# Altium PCB Calimotion7_PCB.PcbDoc
Units mm, origin at the board's own origin, x right, y up, seen from the top; angles counter-clockwise.
Board outline 19 x 51.3 mm, 4 copper layers (Top Layer, GND, Power, Bottom Layer), stack 1.029 mm thick; 65 components, 49 nets, 304 pads, 146 vias.
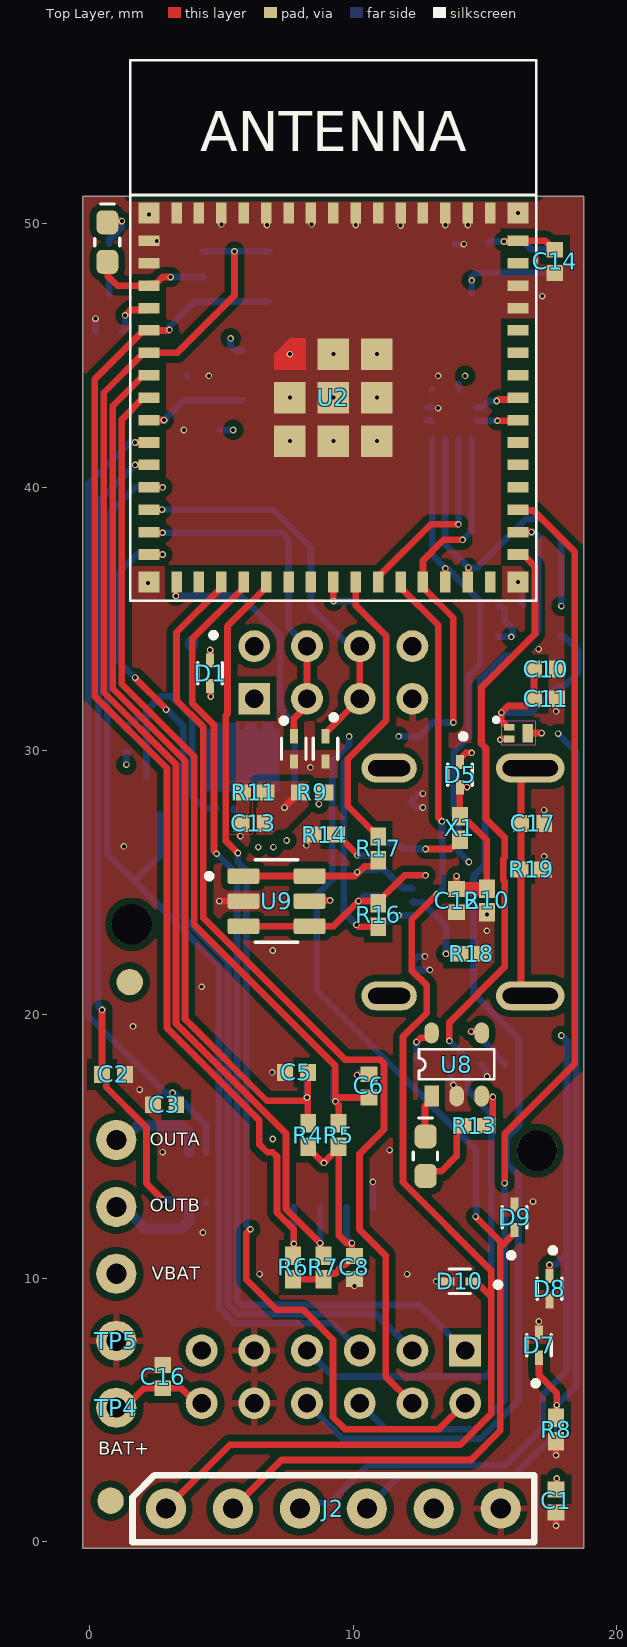
[diagram p0: Top Layer view]
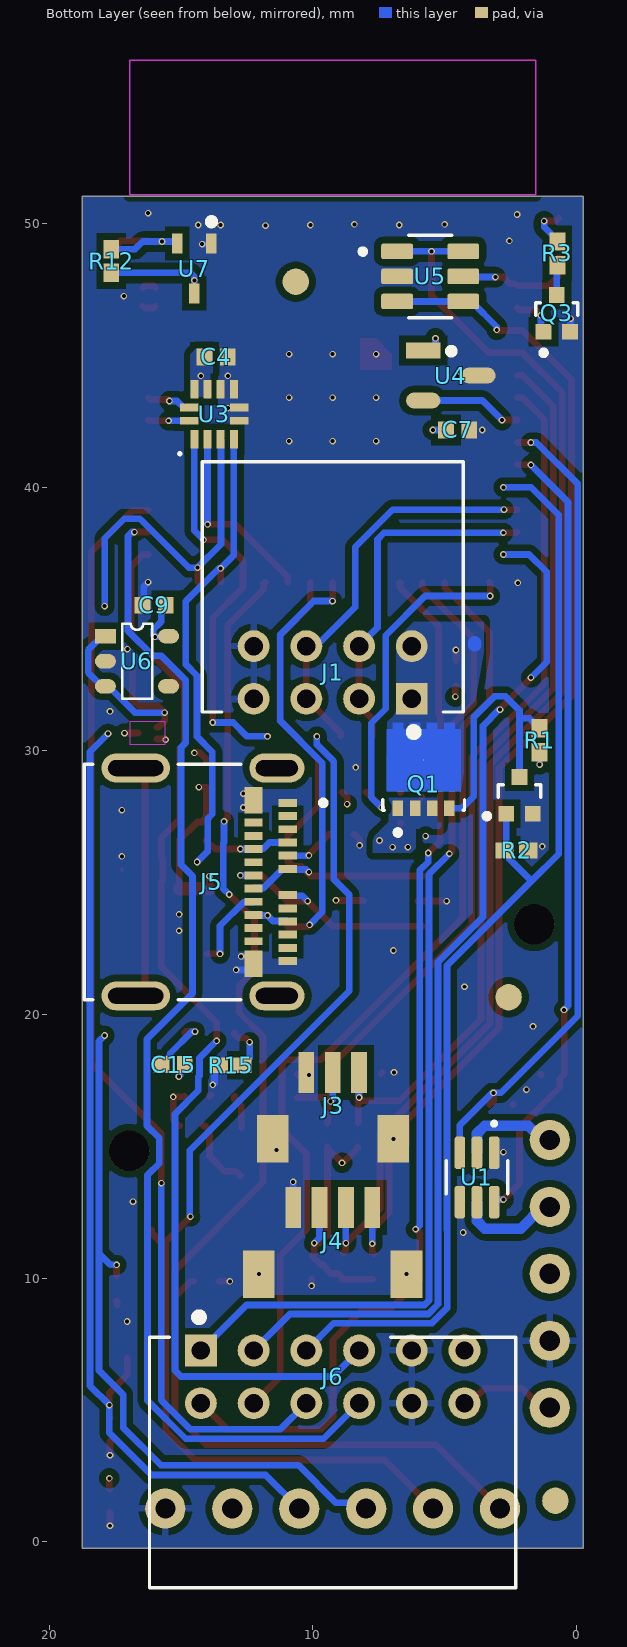
[diagram p1: Bottom Layer view, seen from below]
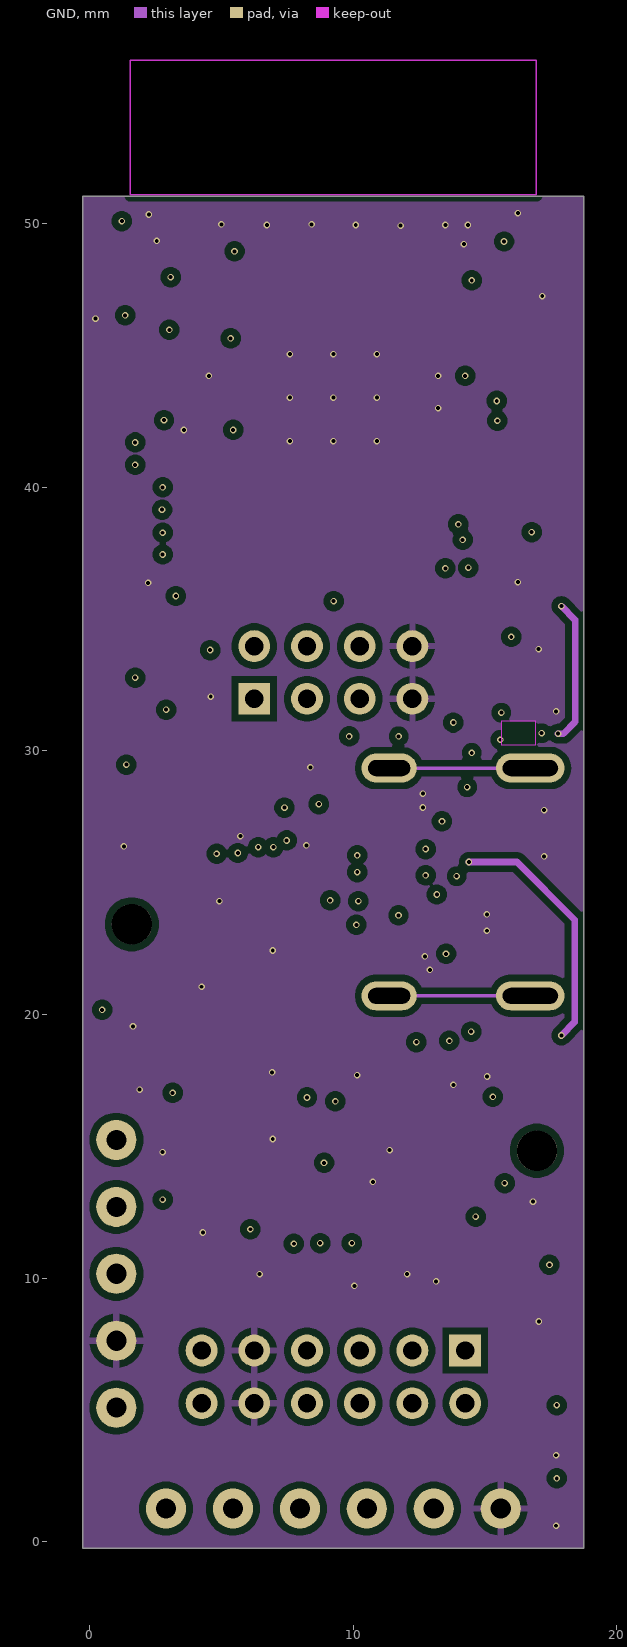
[diagram p2: GND]
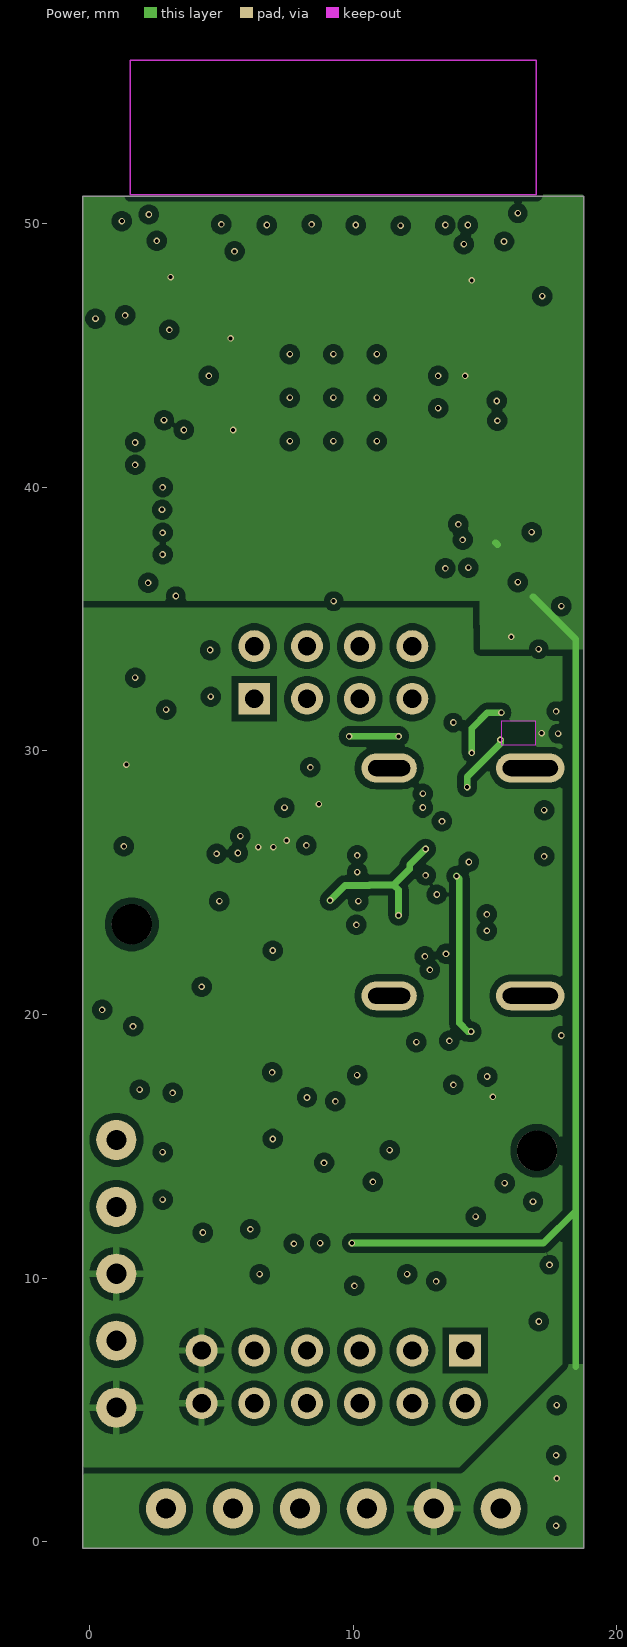
[diagram p3: Power]

## Layer stack, top to bottom
Top Solder: solder mask 0.0102, Solder Resist, Dk 3.5
Top Layer: signal copper 0.035
Dielectric 2: core 0.254, PP-006, Dk 4.2
GND: signal copper 0.035
Dielectric 1: prepreg 0.381, FR-4, Dk 4.2
Power: signal copper 0.035
Dielectric 3: core 0.254, PP-006, Dk 4.2
Bottom Layer: signal copper 0.035
Bottom Solder: solder mask 0.0102, Solder Resist, Dk 3.5

## Board outline
6.1,51.05 12.35,51.05 18.75,51.05 18.75,-0.25 -0.25,-0.25 -0.25,51.05
cut-out: 1.55,51.1 16.95,51.1 16.95,56.175 1.55,56.2

## Design rules (kind name [scope] priority, off if disabled: settings)
Clearance Clearance_1 [(ExistsOnLayer('GND') Or ExistsOnLayer('Power')) vs (ExistsOnLayer('GND') Or ExistsOnLayer('Power'))] p1: gap=0.254 ignorepadtopadclearanceinfootprint=FALSE except(0.09: Arc-Arc Arc-Track Arc-Text Track-Track Track-Text Text-Text; 0.127: Arc-SMDPad Track-SMDPad SMDPad-SMDPad SMDPad-THPad SMDPad-Text) sourcerule=43 cellrowname=All cellrowtype=0 cellcolname=All cellcoltype=0 innerlayers=TRUE
Clearance Clearance_2 [(ExistsOnLayer('Top Layer') Or ExistsOnLayer('Bottom Layer')) vs (ExistsOnLayer('Top Layer') Or ExistsOnLayer('Bottom Layer'))] p2: gap=0.254 ignorepadtopadclearanceinfootprint=FALSE except(0.09: Arc-Arc Arc-Track Arc-Text Track-Track Track-Text Text-Text; 0.127: Arc-SMDPad Track-SMDPad SMDPad-SMDPad SMDPad-THPad SMDPad-Text) sourcerule=43 cellrowname=All cellrowtype=0 cellcolname=All cellcoltype=0 outerlayers=TRUE
Clearance [All] p3: gap=0.254 ignorepadtopadclearanceinfootprint=FALSE ismatrix=TRUE
MinimumSolderMaskSliver [All] p1: minsoldermaskwidth=0.1
PolygonConnect [All] p1: connectstyle=Relief reliefconductorwidth=0.254 reliefentries=4 polygonreliefangle="90 Angle" airgapwidth=0.254
RoutingVias RoutingViaStyle_1 [All] p1: holewidth=0.15 width=0.3 viastyle="Through Hole" minholewidth=0.15 minwidth=0.25 maxholewidth=0.4 maxwidth=0.5
RoutingVias [All] p2: holewidth=0.711 width=1.27 viastyle="Through Hole" minholewidth=0.711 minwidth=1.27 maxholewidth=0.711 maxwidth=1.27
SilkToSolderMaskClearance [IsPad] p1: minsilkscreentomaskgap=0.15 clearancetoexposedcopper=TRUE
SolderMaskExpansion [All] p1: expansion=0.038 istentingtop=FALSE
SupplyNets "Schematic Supply Nets_5" [InNet('VUSB_FUSED')] p1: voltage=0.000
SupplyNets "Schematic Supply Nets_4" [InNet('VUSB')] p2: voltage=0.000
SupplyNets "Schematic Supply Nets_3" [InNet('VOUT')] p3: voltage=0.000
SupplyNets "Schematic Supply Nets_2" [InNet('GND')] p4: voltage=0.000
SupplyNets "Schematic Supply Nets_1" [InNet('VCPU')] p5: voltage=0.000
SupplyNets "Schematic Supply Nets" [InNet('VBAT')] p6: voltage=0.000
Width MaxMinWidth_1 [All] p1: maxlimit=1 minlimit=0.09 preferedwidth=0.254 minimp=50.000000 maximp=50.000000 favimp=50.000000
28 further rules are at their usual default settings.

## Classes and differential pairs
component class Power_Delivery: C9 C10 C11 C12 C13 C14 C15 C16 C17 C? D5 D? J5 J6 R9 R10 R11 R12 R13 R14 R15 R16 R17 R18 R19 R? TP4 TP5 U6 U7 U8 U9 VBAT X1 X?
component class "Calimotion 7": C1 C2 C3 C4 C5 C6 C7 C8 D1 D7 D8 D9 D10 J1 J2 J3 J4 OUTA OUTB Q3 R1 R3 R4 R5 R6 R7 R8 U1 U2 U3 U4 U5

## Components (designator, comment, footprint, x,y, rotation, side; value= is the part's Value field where it differs from the comment)
C1 "Capacitor" "CAP 0402_1005" 17.7,1.54 r90 top value=2.2u
C2 "Capacitor" "CAP 0402_1005" 0.91,17.725 r180 top value=100n
C3 "Capacitor" "CAP 0402_1005" 2.85,16.575 r180 top value=100n
C4 "Capacitor" "CAP 0402_1005" 13.675,44.95 r0 bottom value=2.2u
C5 "Capacitor" "CAP 0402_1005" 7.85,17.8 r180 top value=100n
C6 "Capacitor" "CAP 0402_1005" 10.6,17.29 r90 top value=100n
C7 "Capacitor" "CAP 0402_1005" 4.51,42.175 r0 bottom value=100n
C8 "Capacitor" "CAP 0402_1005" 10.05,10.4 r90 top value=2.2u
C9 "Capacitor" "CAP 0402_1005" 16.025,35.525 r180 bottom value=2.2u
C10 "Capacitor" "CAP 0402_1005" 17.3,33.1 r0 top value=2.2u
C11 "Capacitor" "CAP 0402_1005" 17.3,31.975 r0 top value=2.2u
C12 "Capacitor" "CAP 0402_1005" 13.925,24.315 r90 top value=100n
C13 "Capacitor" "CAP 0402_1005" 6.21,27.25 r180 top value=100n
C14 "Capacitor" "CAP 0402_1005" 17.65,48.575 r90 top value=100n
C15 "Capacitor" "CAP 0402_1005" 15.3,18.1 r180 bottom value=2.2u
C16 "Capacitor" "CAP 0402_1005" 2.775,6.26 r270 top value=2.2u
C17 "Capacitor" "CAP 0402_1005" 16.81,27.25 r0 top value=10n
D1 "TVS" SOD-923 4.575,32.945 r270 top
D5 "SHOTTKY" SOD-923 14.05,29.1 r270 top
D7 "TVS" SOD-923 17.05,7.45 r90 top
D8 "TVS" SOD-923 17.45,9.6 r270 top
D9 "TVS" SOD-923 16.125,12.305 r90 top
D10 "TVS" SOD-923 14.05,9.875 r180 top
J1 "S8B-PHDSS" JST_S8B-PHDSS 6.25,31.975 r0 bottom locked
J2 "1x06 Conn. 2.54mm" "1x06 Conn. 2.54mm" 9.25,1.25 r0 top locked
J3 "BM03B-SRSS-TB" BM03B-SRSS-TB 9.25,15.225 r180 bottom locked
J4 "BM04B-SRSS-TB" BM04B-SRSS-TB 9.225,10.825 r180 bottom locked
J5 "10152803-00011LF" AMPHENOL_10152803-00011LF 16.725,25.025 r270 bottom locked
J6 "S12B-PHDSS" JST_S12B-PHDSS 14.25,7.25 r180 bottom locked
OUTA "OUT B" THT-Test_Point 1.016,15.24 r0 top (schematic designator TP1)
OUTB "OUT A" THT-Test_Point 1.016,12.7 r90 top (schematic designator TP2)
Q1 "MOSFET-P" TRANS_8PDFN 5.8,29.3 r90 bottom
Q3 "MOSFET-N" TRANS_SOT-416 0.75,46.6 r90 bottom
R1 "Resistor" "RES 0402_1005 RF" 1.4,30.4 r270 bottom value=10K
R2 "Resistor" "RES 0402_1005 RF" 2.275,26.225 r180 bottom value=10K
R3 "Resistor" "RES 0402_1005 RF" 0.725,48.875 r90 bottom value=2K
R4 "Resistor" "RES 0402_1005 RF" 8.3,15.425 r90 top value=10K
R5 "Resistor" "RES 0402_1005 RF" 9.45,15.425 r90 top value=10K
R6 "Resistor" "RES 0402_1005 RF" 7.725,10.4 r270 top value=5.1k
R7 "Resistor" "RES 0402_1005 RF" 8.875,10.4 r270 top value=5.1k
R8 "Resistor" "RES 0402_1005 RF" 17.7,4.25 r90 top value=10K
R9 "Resistor" "RES 0402_1005 RF" 8.45,28.425 r180 top value=47K
R10 "Resistor" "RES 0402_1005 RF" 15.075,24.325 r270 top value=100k
R11 "Resistor" "RES 0402_1005 RF" 6.225,28.425 r180 top value=47K
R12 "Resistor" "RES 0402_1005 RF" 17.65,48.585 r270 bottom value=10K
R13 "Resistor" "RES 0402_1005 RF" 14.6,15.775 r180 top value=2.2k
R14 "Resistor" "RES 0402_1005 RF" 8.9,26.825 r180 top value=5.1k
R15 "Resistor" "RES 0402_1005 RF" 13.125,18.075 r0 bottom value=2.7k
R16 "Resistor" "RES 0402_1005 RF" 10.95,23.775 r270 top value=22
R17 "Resistor" "RES 0402_1005 RF" 10.95,26.3 r90 top value=22
R18 "Resistor" "RES 0402_1005 RF" 14.475,22.3 r180 top value=5.1k
R19 "Resistor" "RES 0402_1005 RF" 16.75,25.5 r0 top value=100k
TP4 "BAT+" THT-Test_Point 1.016,5.08 r90 top
TP5 "BAT-" THT-Test_Point 1.016,7.62 r90 top
U1 "DMG1024UV-7" 74LVC2G17GW,125 3.775,13.815 r270 bottom
U2 "ESP32-S3-MINI-1" ESP32-S3-MINI-1 9.25,43.4 r0 top locked
U3 "LIS2DE12TR" LIS2DE12TR_200X200X100-12N 13.75,42.775 r90 bottom
U4 "DRV5055" SOT23-3 4.775,44.225 r180 bottom
U5 "USBLC6-2SC6" SOT95P280X145-6N 5.55,48 r180 bottom
U6 "XC6210B332MR-G" SOT-25 16.675,33.4 r180 bottom
U7 "MIC803-29D3VC3" MIC803-29D3VC3 14.5,48.25 r0 bottom
U8 "XC6802A42XMR-G" SOT-25 13.925,18.1 r90 top
U9 "USBLC6-2SC6" SOT95P280X145-6N 7.095,24.3 r0 top
VBAT "VBAT" THT-Test_Point 1.016,10.16 r90 top (schematic designator TP3)
X1 "Fuse" "RES 0402_1005 RF" 14.05,27.075 r90 top

## Footprints (in the part's own frame and the unit in brackets; to place one, negate y for a bottom-side part, rotate by r counter-clockwise, add the part's x,y. Pads: shape width x height; smd on the part's side, far side on the other; paste and mask are expansions set on the pad)
"1x06 Conn. 2.54mm" [mil]
  round 60 hole 30: 1(-250,0) 2(-150,0) 3(-50,0) 4(50,0) 5(150,0) 6(250,0)
  silkscreen extent -300,-50 300,50
74LVC2G17GW,125 [mm] "SOP65 P210X110-6N"
  rrect50% 1.24x0.4 smd: 1(-0.935,0.65) 2(-0.935,0) 3(-0.935,-0.65) 4(0.935,-0.65) 5(0.935,0) 6(0.935,0.65)
  silkscreen extent -2.11,-1.16 0.63,1.16, body extent -1.05,-1 1.05,1, height 1.1
AMPHENOL_10152803-00011LF [mm]
  rect 0.3x0.7 smd: A1(-3,5.77) A2(-2.5,5.77) A3(-2,5.77) A4(-1.5,5.77) A5(-1,5.77) A6(-0.5,5.77) A7(0.5,5.77) A8(1,5.77) A9(1.5,5.77) A10(2,5.77) A11(2.5,5.77) A12(3,5.77) B2(2.25,4.47) B3(1.75,4.47) B4(1.25,4.47) B5(0.75,4.47) B6(0.25,4.47) B7(-0.25,4.47) B8(-0.75,4.47) B9(-1.25,4.47) B10(-1.75,4.47) B11(-2.25,4.47)
  rect 1x0.7 smd: B1(3.1,4.47) B12(-3.1,4.47)
  oval 1.1x2.6 hole 0.6 slot 2.1 at 90 deg: S1(-4.32,0) S2(4.32,0)
  oval 1.1x2.1 hole 0.6 slot 1.6 at 90 deg: S3(-4.32,5.36) S4(4.32,5.36)
  silkscreen extent -4.47,-1.95 4.47,7.22, body extent -4.5,-1.83 4.45,6.07, height 3.23
BM03B-SRSS-TB [mm] "Connector Header Surface Mount 3 position 0.039\" (1.00mm)"
  rect 0.6x1.55 smd: 1(1,2.575) 2(0,2.575) 3(-1,2.575)
  rect 1.2x1.8 smd: 4(-2.275,0.05) 5(2.3,0.05)
  body extent -2.5,-0.7 2.5,2.9, height 4.25
BM04B-SRSS-TB [mm] "Connector Header Surface Mount 4 position 0.039\" (1.00mm)"
  rect 0.6x1.55 smd: 1(1.475,1.85) 2(0.475,1.85) 3(-0.525,1.85) 4(-1.525,1.85)
  rect 1.2x1.8 smd: 4(-2.825,-0.675) 5(2.775,-0.675)
  body extent -3,-1.45 3,2.15, height 4.35
"CAP 0402_1005" [mm] "Chip Capacitor, 2-Leads, Body 1.02x0.51mm, IPC Medium Density"
  rect 0.6x0.64 smd: 1(-0.44,0) 2(0.44,0)
  body extent -0.5,-0.26 0.5,0.26, height 0.52
ESP32-S3-MINI-1 [mm]
  rect 0.8x0.4 smd: 1(-7,5.95) 2(-7,5.1) 3(-7,4.25) 4(-7,3.4) 5(-7,2.55) 6(-7,1.7) 7(-7,0.85) 8(-7,0) 9(-7,-0.85) 10(-7,-1.7) 11(-7,-2.55) 12(-7,-3.4) 13(-7,-4.25) 14(-7,-5.1) 15(-7,-5.95) 31(7,-5.95) 32(7,-5.1) 33(7,-4.25) 34(7,-3.4) 35(7,-2.55) 36(7,-1.7) 37(7,-0.85) 38(7,0) 39(7,0.85) 40(7,1.7) 41(7,2.55) 42(7,3.4) 43(7,4.25) 44(7,5.1) 45(7,5.95)
  rect 0.4x0.8 smd: 16(-5.95,-7) 17(-5.1,-7) 18(-4.25,-7) 19(-3.4,-7) 20(-2.55,-7) 21(-1.7,-7) 22(-0.85,-7) 23(0,-7) 24(0.85,-7) 25(1.7,-7) 26(2.55,-7) 27(3.4,-7) 28(4.25,-7) 29(5.1,-7) 30(5.95,-7) 46(5.95,7) 47(5.1,7) 48(4.25,7) 49(3.4,7) 50(2.55,7) 51(1.7,7) 52(0.85,7) 53(0,7) 54(-0.85,7) 55(-1.7,7) 56(-2.55,7) 57(-3.4,7) 58(-4.25,7) 59(-5.1,7) 60(-5.95,7)
  rect 1.2x1.2 smd: 61(-1.65,-1.65) 61(-1.65,0) 61(0,-1.65) 61(0,1.65) 61(0,0) 61(1.65,-1.65) 61(1.65,0) 61(1.65,1.65)
  round 0.025 smd: 61(-1.65,1.65)
  rect 0.8x0.8 smd: 62(-7,7) 63(-7,-7) 64(7,-7) 65(7,7)
  Top Layer region: -2.25,1.65 -2.25,1.05 -1.05,1.05 -1.05,2.25 -1.65,2.25
  Keep-Out Layer region: -7.7,7.7 7.7,7.7 7.7,12.8 -7.7,12.8
  Keep-Out Layer region: -7.7,12.8 7.7,12.8 7.7,7.7 -7.7,7.7
  silkscreen extent -7.7,-7.7 7.7,12.8, body extent -7.7,-7.73 7.7,12.78, height 2.55
JST_S8B-PHDSS [mm] "Connector Header Through Hole, Right Angle 8 position 0.079\" (2.00mm)"
  rect 1.208x1.208 hole 0.7: 1(0,0)
  round 1.208 hole 0.7: 2(0,-2) 3(2,0) 4(2,-2) 5(4,0) 6(4,-2) 7(6,0) 8(6,-2)
  silkscreen extent -1.95,-9 7.95,1.41, body extent -1.95,-9 7.95,0.5, height 5
JST_S12B-PHDSS [mm] "Connector Header Through Hole, Right Angle 12 position 0.079\" (2.00mm)"
  rect 1.208x1.208 hole 0.7: 1(0,0)
  round 1.208 hole 0.7: 2(0,-2) 3(2,0) 4(2,-2) 5(4,0) 6(4,-2) 7(6,0) 8(6,-2) 9(8,0) 10(8,-2) 11(10,0) 12(10,-2)
  silkscreen extent -1.95,-9 11.95,1.41, body extent -1.95,-9 11.95,0.5, height 5
LIS2DE12TR_200X200X100-12N [mm]
  rect 0.7x0.3 smd: 1(-0.95,0.75) 2(-0.95,0.25) 3(-0.95,-0.25) 4(-0.95,-0.75) 7(0.95,-0.75) 8(0.95,-0.25) 9(0.95,0.25) 10(0.95,0.75)
  rect 0.3x0.7 smd: 5(-0.25,-0.95) 6(0.25,-0.95) 11(0.25,0.95) 12(-0.25,0.95)
  silkscreen extent -1.55,1.25 -1.45,1.35, body extent -1,-1 1,1, height 1
MIC803-29D3VC3 [mm] "Supervisor Open Drain or Open Collector 1 Channel SC-70-3 Voltage - Threshold 2.93V"
  rect 0.4x0.75 smd: 1(-0.65,-1) 2(0.65,-1) 3(0,0.9)
  silkscreen extent -0.77,-1.95 -0.53,-1.7, body extent -1.13,-1.26 1.13,1.16, height 1.09
"RES 0402_1005 RF" [mm] "Chip Resistor, 2-Leads, Body 1.0x0.5mm, IPC High Density"
  rect 0.7x0.6 smd: 1(-0.45,0) 2(0.45,0)
  body extent -0.5,-0.25 0.5,0.25, height 0.35
SOD-923 [mm]
  rect 0.54x0.3 smd: A(0.48,0) C(-0.48,0)
  silkscreen extent -1.55,-0.47 0.4,0.47, body extent -0.5,-0.3 0.5,0.3, height 0.4
SOT23-3 [mm]
  rect 1.3x0.6 smd: 1(-1.041,0.965)
  oval 1.3x0.6 smd: 2(-1.041,-0.935) 3(1.059,0.015)
  silkscreen extent -0.09,0.83 0.14,1.05, body extent -1.18,-1.46 1.18,1.46, height 1.12
SOT95P280X145-6N [mm]
  rrect25% 1.21x0.59 smd: 1(-1.255,0.95) 2(-1.255,0) 3(-1.255,-0.95) 4(1.255,-0.95) 5(1.255,0) 6(1.255,0.95)
  silkscreen extent -2.66,-1.57 0.81,1.57, body extent -1.4,-1.46 1.4,1.46, height 1.44
SOT-25 [mm]
  rect 0.8x0.55 smd: 1(-1.2,0.95)
  oval 0.8x0.55 smd: 2(-1.2,0) 3(-1.2,-0.95) 4(1.2,-0.95) 5(1.2,0.95)
  silkscreen extent -0.57,-1.42 0.57,1.43, body extent -1.4,-1.45 1.4,1.45, height 1.3
THT-Test_Point [mil]
  round 60 hole 30: 1(0,0)
TRANS_8PDFN [mm]
  rect 0.6x0.4 smd: 1(-1.475,0.975) 2(-1.475,0.325) 3(-1.475,-0.325) 4(-1.475,-0.975)
  round 0.025 smd paste-1 mask+0: 5_8(0.35,0)
  Top Layer region: 1.525,1.175 1.775,1.175 1.775,0.775 1.525,0.775 1.525,0.525 1.775,0.525 1.775,0.125 1.525,0.125 1.525,-0.125 1.775,-0.125 1.775,-0.525 1.525,-0.525 1.525,-0.775 1.775,-0.775 1.775,-1.175 1.525,-1.175 1.525,-1.4 -0.825,-1.4 -0.825,1.4 1.525,1.4
  silkscreen extent -2.5,-1.55 -1.15,1.55, body extent -1.68,-1.65 1.68,1.65, height 0.8
TRANS_SOT-416 [mm]
  rect 0.6x0.6 smd paste-1: D(0.7,0) G(-0.7,0.5) S(-0.7,-0.5)
  silkscreen extent -1.6,-0.8 0.4,0.8, body extent -0.9,-0.8 0.9,0.8, height 0.8

## Part data
D1 D7 D8 D9 D10: library part DIO_1027, "TVS 5.8V 50W SOD523", Curr=50W, Manufacturer="On Semiconductor", Voltage=5.8V, Bin="2161 -- CT 198", FB_PCB_Number=DIO_1027, P_Id=27, Part_number=ESD5B5.0ST1G, Price=0.04790, Prod_Id=1045, Quantity=0
D5: "Generic Shottky", Package="SOD-923 ON Semiconductor", Availability=Unavailable, MF="ON Semiconductor", MP=ESD9X5.0ST5G, Price=None, SnapEDA_Link=https://www.snapeda.com/parts/ESD9X5.0ST5G/ON%20Semiconductor/view-part/237761/?ref=snap
J1: "Connector Header Through Hole, Right Angle 8 position 0.079 _2.00mm_", Package=None, Availability=Unavailable, MF="JST Sales", MP=S8B-PHDSS, Price=None, SnapEDA_Link=https://www.snapeda.com/parts/S8B-PHDSS/JST%20Sales%20America%20Inc./view-part/761599/?ref=snap
J3: "Connector Header Surface Mount 3 position 0.039\" (1.00mm)"
J4: "Connector Header Surface Mount 4 position 0.039\" (1.00mm)"
J5: "USB 3.2 Type C GEN 2 Receptacle SMT Dual Row 24in", Package=None, Availability="In Stock", Check_prices=https://www.snapeda.com/parts/10152803-00011LF/Amphenol/view-part/?ref=eda, MF="Amphenol FCI", MP=10152803-00011LF, Price=None, Purchase-URL=https://pricing.snapeda.com/search?q=10152803-00011LF&ref=eda, SnapEDA_Link=https://www.snapeda.com/parts/10152803-00011LF/Amphenol/view-part/?ref=snap
J6: "Connector Header Through Hole, Right Angle 12 position 0.079 _2.00mm_", Package=None, Availability=Unavailable, MF="JST Sales", MP=S8B-PHDSS, Price=None, SnapEDA_Link=https://www.snapeda.com/parts/S8B-PHDSS/JST%20Sales%20America%20Inc./view-part/761599/?ref=snap
OUTA OUTB TP4 TP5 VBAT: library part "Test Point"
Q1: "AON7423"
Q3: library part TRANS_1057, "MOSFET N-CH 20V 915MA SOT-416", Curr=915mA, Manufacturer="ON Semiconductor", Voltage=20V, FB_PCB_Number=TRANS_1057, Part_number=NTA4153NT1G, Price=NA, Pwr=300mW, Quantity=0
U1: "Mosfet Array 2 N-Channel _Dual_ 20V 1.38A 530mW Surface Mount SOT-563", Package="SOT-563 Diodes Inc.", Availability=Unavailable, MF="Diodes Inc.", MP=DMG1024UV-7, Price=None, SnapEDA_Link=https://www.snapeda.com/parts/DMG1024UV-7/Diodes%20Inc./view-part/391731/?ref=snap
U2: "Bluetooth, WiFi 802.11b/g/n, Bluetooth v5.0 Transceiver Module 2.4GHz PCB Trace Surface Mount"
U3: "Accelerometer X, Y, Z Axis Â±2g, 4g, 8g, 16g 0.5Hz ~ 2.69kHz 12-LGA _2x2_", Package="LGA-12 STMicroelectronics", Availability=Unavailable, MF=STMicroelectronics, MP=LIS2DE12TR, Price=None, SnapEDA_Link=https://www.snapeda.com/parts/LIS2DE12TR/STMicroelectronics/view-part/470072/?ref=snap
U4: "Hall Effect Sensor Single Axis SOT-23-3"
U5 U9: "17V Clamp 5A (8/20Âµs) Ipp Tvs Diode Surface Mount SOT-23-6", Package="SOT-23-6 STMicroelectronics", Availability="In Stock", Check_prices=https://www.snapeda.com/parts/USBLC6-2SC6/STMicroelectronics/view-part/?ref=eda, MF=STMicroelectronics, MP=USBLC6-2SC6, Price=None, Purchase-URL=https://pricing.snapeda.com/search/part/USBLC6-2SC6/?ref=eda, SnapEDA_Link=https://www.snapeda.com/parts/USBLC6-2SC6/STMicroelectronics/view-part/?ref=snap
U6: "Linear Voltage Regulator IC Positive Fixed 1 Output 700mA SOT-25"
U7: "Supervisor Open Drain or Open Collector 1 Channel SC-70-3 Voltage - Threshold 2.93V"
U8: "Charger IC Lithium Ion/Polymer SOT-25", Package="SOT-753 Torex", Availability=Unavailable, MF=Torex, MP=XC6802A42XMR-G, Price=None, SnapEDA_Link=https://www.snapeda.com/parts/XC6802A42XMR-G/Torex/view-part/378965/?ref=snap
X1: CURRENT=6V_500mA, RESISTANCE=1m, SimulationGenericComponent=True
C1 C2 C3 C4 C5 C6 C7 C8 C9 C10 C11 C12 C13 C14 C15 C16 C17: SimulationGenericComponent=True
R1 R2 R3 R4 R5 R6 R7 R8 R9 R10 R11 R12 R13 R14 R15 R16 R17 R18 R19: SimulationGenericComponent=True, TC1=0, TC2=0

## Free pads (board coordinates)
  rect 0.4x0.25 smd paste-2539.97 mask-2539.97: 1(15.925,30.45) 2(15.925,30.9)
  rect 0.4x0.7 smd paste-2539.97 mask-2539.97: 3(16.625,30.675)
  rrect53% 0.83x0.91 smd: A(0.675,48.55) A(12.75,13.875) C(0.675,50.05) C(12.75,15.375)
  rect 0.3x0.54 smd: A(7.75,29.595) A(8.95,29.595) C(7.75,30.555) C(8.95,30.555)
  rect 0.6x0.6 smd far side paste-1: D(2.163,29.013) G(2.662,27.613) S(1.663,27.613)
  round 1 smd mask-2539.97: FID(0.8,1.55) FID(1.525,21.225)
  round 1 smd far side mask+0.038: FID(0.8,1.55) FID(2.575,20.65) FID(10.65,47.8)
  round 1.524 hole 1.524: MNT(1.604,23.419) MNT(16.971,14.827)

## Via types
v1: diameter 0.25, hole 0.15, Top Layer to Bottom Layer, 145 vias
v2: diameter 0.25/0.25/0.25/0.25 (per signal layer), hole 0.15, Top Layer to Bottom Layer, 1 vias

## Nets (pads, with @x,y where several pads share a name; then routed paths per layer and width w, separated by ;. In a path a pad name is that pad's centre, name@x,y a point inside that pad or via, vN(x,y) a via of type N, cw(c..) or ccw(c..) an arc to the next point about the centre after c; other vN are vias at no path point)
ACCEL_INT1: U2.37 U3.12 | length 1.6
  Top Layer w0.254: v1(15.475,42.525) 16.225,42.525 U2.37
  Bottom Layer w0.254: U3.12 v1(15.475,42.525)
ACCEL_INT2: U2.38 U3.11 | length 1.7
  Top Layer w0.254: v1(15.45,43.275) 15.502,43.327 16.177,43.327 U2.38
  Bottom Layer w0.254: U3.11 14.9,43.025 15.15,43.275 v1(15.45,43.275)
BUTTON_A: C5.1 J3.1 R4.2 U2.7 | length 35.1
  Top Layer w0.254: U2.7 2.05,44.25 0.881,43.081 0.881,32.367 3.625,29.623 3.625,19.825 6.725,16.725 8.125,16.725 v1(8.25,16.85) ; C5.1@8.275,17.785 8.275,16.875 v1(8.25,16.85) ; R4.2 8.275,15.9 8.275,16.825 v1(8.25,16.85)
  Bottom Layer w0.254: v1(8.25,16.85) J3.1
BUTTON_B: C6.1 J3.2 R5.2 U2.8 | length 33.9
  Top Layer w0.254: U2.8 2.05,43.4 1.225,42.575 1.225,32.525 3.975,29.775 3.975,23.4 9.325,18.05 v1(9.325,16.7) ; R5.2 9.45,16.575 v1(9.325,16.7) ; C6.1 9.475,16.85 v1(9.325,16.7)
  Bottom Layer w0.254: J3.2 9.25,16.775 v1(9.325,16.7)
CPU_LED: Q3.G U2.4 | length 1.7
  Top Layer w0.254: v1(1.35,46.525) 1.552,46.727 2.177,46.727 U2.4
  Bottom Layer w0.254: Q3.G 1.35,46 v1(1.35,46.525)
CS0: U2.25 U3.2 | length 7.3
  Top Layer w0.254: U2.25 10.95,36.6 12.944,38.594 v1(13.994,38.594)
  Bottom Layer w0.254: v1(13.994,38.594) 14,38.6 U3.2
CS1: D10.C J2.1 U2.26 | length 49.5
  Top Layer w0.254: J2.1 5.325,3.675 14.068,3.675 15.235,4.842 15.235,9.29 ; U2.26 11.873,36.327 11.873,36.127 13.235,34.765 13.235,27.461 v1(13.371,27.325) ; v1(13.175,24.55) 12.219,23.594 12.219,21.668 12.796,21.091 12.796,20.062 11.894,19.16 11.894,13.631 15.235,10.29 15.235,9.29 ; D10.C 14.65,9.875 15.235,9.29
  Bottom Layer w0.254: v1(13.175,24.55) 13.406,24.781 13.406,26.485 13.371,26.52 v1(13.371,27.325)
D+: J5.A6 J5.B6 R17.1 U9.1 U9.6 | length 7.9
  Top Layer w0.254: U9.1 U9.6 10.075,25.25 10.225,25.4 10.452,25.627 10.777,25.627 10.95,25.8 R17.1 R17.1@10.913,25.887
  Bottom Layer w0.254: v1(10.156,25.4) 10.258,25.502 10.932,25.502 J5.A6 11.155,25.525 11.178,25.502 11.178,25.493 11.873,24.798 12.232,24.798 J5.B6
D-: J5.A7 J5.B7 R16.1 U9.3 U9.4 | length 9.1
  Top Layer w0.254: U9.3 U9.4 9.255,23.35 10.2,24.295 v1(10.2,24.3) 10.875,24.3 R16.1 10.95,24.275 11.95,25.275 v1(12.75,25.275)
  Bottom Layer w0.254: v1(10.2,24.3) 10.402,24.502 10.932,24.502 J5.A7 ; J5.B7 v1(12.75,25.275)
ESP_D+: R17.2 U2.24 | length 11.2
  Top Layer w0.254: U2.24 10.1,35.518 11.257,34.361 11.257,31.157 9.8,29.7 9.8,27.9 10.727,26.973 10.777,26.973 10.95,26.8 R17.2
ESP_D-: R16.2 U2.23 | length 15.9
  Top Layer w0.254: U2.23 9.25,35.691 v1(9.258,35.683) ; v1(10.125,23.4) 10.2,23.325 R16.2
  Bottom Layer w0.254: v1(9.258,35.683) 9.967,35.683 11.235,34.415 11.235,31.135 9.65,29.55 9.65,23.875 v1(10.125,23.4)
GND: C1.1 C2.1 C3.2 C4.1 C5.2 C6.2 C7.1 C8.1 C9.1 C10.2 C11.2 C12.1 C13.2 C14.1 C15.2 C16.1 C17.2 D1.A D7.A D8.A D9.A D10.A J1.7 J1.8 J2.6 J3.3 J3.4 J3.5 J4.4 J4.5 J5.A1 J5.A12 J5.B1 J5.B12 J6.9 J6.10 pad.A@7.75,29.595 pad.A@8.95,29.595 pad.S Q3.S R2.2 R8.1 R10.2 R11.2 R14.2 R15.2 R18.1 R19.2 TP5.1 U1.1 U1.4 U2.1 U2.2 U2.42 U2.43 U2.46 U2.47 U2.48 U2.49 U2.50 U2.51 U2.52 U2.53 U2.54 U2.55 U2.56 U2.57 U2.58 U2.59 U2.60 U2.61 U2.62 U2.63 U2.64 U2.65 U3.5 U3.6 U3.7 U3.8 U4.3 U5.2 U6.2 U7.1 U8.2 U9.2 | length 13.8
  Top Layer w0.09: R19.2@17.25,25.45 R19.2 R19.2@17.25,25.55
  Top Layer w0.254: TP5.1@1.016,7.112 1.15,6.978 TP5.1@1.15,7.074 ; C2.1@1.35,17.705 C2.1 ; v1@1.9,17.105 v1@1.9,17.155 ; v1(2.225,36.375) U2.63 ; v1(2.25,50.35) 2.225,50.375 U2.62 ; C3.2 C3.2@2.41,16.595 ; D1.A 4.598,32.442 v1(4.598,32.055) ; v1(4.925,24.3) U9.2@6.013,24.3 ; R11.2@5.87,28.245 R11.2@5.875,28.25 ; C5.2@7.37,17.8 C5.2@7.425,17.745 ; v1(8.227,26.414) 8.227,26.652 8.4,26.825 R14.2 ; v1(10.05,9.7) C8.1 ; v1(10.15,17.7) 10.57,17.7 C6.2 ; v1(13.15,9.875) D10.A ; U8.2@13.868,16.957 U8.2 ; U2.42@15.977,46.873 16.05,46.8 U2.42 16.377,46.8 U2.42@16.45,46.873 ; U2.43@15.977,47.577 16.05,47.65 U2.43 16.377,47.65 U2.43@16.45,47.577 ; v1(16.25,50.4) U2.65@16.275,50.375 ; D8.A@17.427,8.977 17.427,9.097 D8.A ; C14.1@17.63,48.135 C14.1 ; v1(17.7,0.6) C1.1 ; v1(17.7,3.275) R8.1
  Bottom Layer w0.254: v1(0.225,46.4) 0.225,45.925 Q3.S ; U4.3 U4.3@3.732,44.225 ; U1.4@4.404,12.859 U1.4 ; v1(10.15,17.7) J3.3 ; J4.4@10.75,12.675 v1(10.75,13.65) ; J5.B12@12.18,28.05 12.38,27.85 v1(12.644,27.85) ; J5.B1 12.255,21.848 12.478,21.625 12.478,21.689 v1(12.914,21.689) ; J5.B1@12.255,22.002 12.453,22.2 v1(12.725,22.2) ; J5.B12 12.255,28.151 12.478,28.374 v1(12.644,28.374) ; U3.5 U3.5@13,42.525 ; U3.6 12.954,43.025 U3.6@12.977,43.048 ; U3.7@12.977,43.702 U3.7 ; R15.2 13.731,17.919 13.731,17.394 v1(13.8,17.325) ; U7.1 13.875,49.225 v1(14.2,49.225) ; C15.2 14.86,18.08 15.033,17.907 15.033,17.697 v1(15.086,17.644) ; v1(16.25,36.4) 16.424,36.226 16.424,35.566 C9.1 ; U6.2@17.67,33.4 U6.2
  other v1: 17.05,8.35 6.45,10.15 12.05,10.15 4.3,11.725 16.825,12.9 2.775,14.775 11.388,14.85 6.95,15.275 1.9,17.15 6.925,17.8 1.65,19.55 4.25,21.05 6.95,22.425 15.075,23.175 15.075,23.8 17.25,26 1.3,26.375 5.722,26.765 17.25,27.75 8.375,29.375 17.7,31.5 17.041,33.859 7.6,41.75 9.25,41.75 10.9,41.75 3.575,42.175 13.225,43 7.6,43.4 9.25,43.4 10.9,43.4 4.525,44.225 13.225,44.225 7.6,45.05 9.25,45.05 10.9,45.05 17.175,47.25 2.55,49.35 11.8,49.925 6.725,49.95 10.1,49.95 13.5,49.95 14.35,49.95 5,49.975 8.425,49.975
HALL_EFFECT_IN: U2.9 U4.2 | length 3.9
  Top Layer w0.254: U2.9 v1(2.825,42.55)
  Bottom Layer w0.254: v1(2.825,42.55) 3.565,43.29 U4.2
LED_OUT_A: J1.3 J1.4 pad.C@7.75,30.555 U2.14 | length 13.4
  Top Layer w0.254: U2.14 2.275,38.275 v1(2.775,38.275) ; pad.C@7.75,30.555 7.744,30.561 7.744,31.211 8.25,31.717 J1.3 J1.4
  Bottom Layer w0.254: v1(2.775,38.275) 7.3,38.275 7.55,38.025 7.55,34.675 J1.4
LED_OUT_B: J1.5 J1.6 pad.C@8.95,30.555 U2.13 | length 15.4
  Top Layer w0.254: U2.13 v1(2.75,39.15) ; pad.C@8.95,30.555 8.95,30.675 J1.5 J1.6
  Bottom Layer w0.254: v1(2.75,39.15) 6.975,39.15 8.4,37.725 8.4,35.45 9.692,34.158 10.067,34.158 J1.6
MISO: D7.C J2.4 R8.2 U2.29 U3.3 | length 56.8
  Top Layer w0.254: J2.4 J2.4@10.739,1.469 ; U2.29 14.375,36.425 v1(14.375,36.95) ; D7.C 17.05,6.319 17.725,5.644 17.725,4.725 R8.2
  GND w0.254: v1(17.775,30.65) 17.975,30.65 18.425,31.1 18.425,34.966 v1(17.9,35.491)
  Bottom Layer w0.254: J2.4 11.795,2.525 16.125,2.525 17.725,4.125 v1(17.725,5.175) 18.458,5.908 18.458,29.967 v1(17.775,30.65) ; U3.3 13.488,41.813 13.488,37.837 v1(14.375,36.95) 14.709,36.95 16.565,38.806 17.16,38.806 17.9,38.066 v1(17.9,35.491)
MOSFET_OUT_A: OUTB.1 U1.5 | length 3.9
  Bottom Layer w0.4: OUTB.1@1.293,12.7 2.118,11.875 3.482,11.875 3.775,12.168 U1.5
  Bottom Layer w0.5: OUTB.1 OUTB.1@1.293,12.7
MOSFET_OUT_B: OUTA.1 U1.2 | length 3.8
  Bottom Layer w0.4: OUTA.1@1.293,15.24 1.828,15.775 3.482,15.775 3.775,15.482 U1.2
  Bottom Layer w0.5: OUTA.1 OUTA.1@1.293,15.24
MOSI: D8.C J2.3 U2.28 U3.4 | length 54.6
  Top Layer w0.254: U2.28 v1(13.5,36.925) ; D8.C v2(17.45,10.5)
  GND w0.254: v1(14.391,25.784) 16.216,25.784 18.406,23.594 18.406,19.706 v1(17.9,19.2)
  Bottom Layer w0.254: J2.3 8.199,1.469 9.123,1.469 10.554,2.9 15.775,2.9 17.2,4.325 17.2,5.575 18.114,6.489 18.114,10.939 ; U3.4 13,37.425 v1(13.5,36.925) 13.575,36.925 14.821,35.679 14.821,33.271 14.4,32.85 14.4,30.541 13.819,29.96 13.819,27.595 13.994,27.42 13.994,26.181 v1(14.391,25.784) ; v2(17.45,10.5) 17.675,10.5 18.114,10.939 ; v1(17.9,19.2) 18.114,18.986 18.114,10.939
NetC10_1: C10.1 C11.1 D5.C pad.2 U6.1 U6.3 | length 11.5
  Top Layer w0.254: D5.C 14.05,29.7 14.275,29.925 v1(14.5,29.925) ; pad.2 15.854,30.9 15.625,31.129 v1(15.625,31.45) 15.875,31.7 16.585,31.7 16.667,31.782 16.687,31.782 16.86,31.955 C11.1 C10.1
  Power w0.254: v1(14.5,29.925) 14.5,30.85 15.1,31.45 v1(15.625,31.45)
  Bottom Layer w0.254: v1(15.625,31.45) 16.75,31.45 17.75,32.45 U6.3 18,32.45 18.529,32.979 18.529,33.821 18,34.35 U6.1
NetC13_1: C13.1 R9.2 R11.1 U2.16 | length 12.9
  Top Layer w0.254: v1(3.275,35.875) 3.275,36.375 U2.16 ; C13.1 6.662,27.263 C13.1@6.675,27.275 ; R11.1@6.662,28.413 R11.1 ; v1(7.396,27.848) 7.396,27.871 7.95,28.425 R9.2
  Bottom Layer w0.254: v1(3.275,35.875) 5.743,35.875 7.235,34.383 7.235,31.597 7.785,31.047 7.785,28.237 v1(7.396,27.848)
NetC14_2: C14.2 R12.1 U2.45 U7.2 | length 4.7
  Top Layer w0.254: v1(15.725,49.325) 16.225,49.325 U2.45 17.295,49.35 17.63,49.015 C14.2
  Bottom Layer w0.254: U7.2 15.15,49.252 15.223,49.325 16.456,49.325 16.746,49.035 R12.1
NetC17_1: C17.1 J5.S1 J5.S2 J5.S3 J5.S4 R19.1 | length 19.7
  Top Layer w0.127: J5.S2@16.369,21.061 J5.S2 ; R19.1@16.369,25.431 R19.1 R19.1@16.37,25.57 ; J5.S1@16.37,28.99 J5.S1
  Top Layer w0.254: J5.S2@16.369,21.061 R19.1@16.369,25.431 ; R19.1@16.37,25.57 C17.1 J5.S1@16.37,28.99
  GND w0.127: J5.S4 J5.S2 ; J5.S3 J5.S1
NetD4_2: pad.C@0.675,50.05 R3.2 | length 1.6
  Top Layer w0.254: pad.C@0.675,50.2 0.775,50.1 v1(1.225,50.1)
  Bottom Layer w0.254: R3.2@0.75,49.25 0.75,49.4 1.225,49.875 v1(1.225,50.1)
NetD6_1: pad.A@12.75,13.875 R13.2 | length 2.8
  Top Layer w0.254: pad.A@12.75,13.875 12.923,14.048 13.348,14.048 13.927,14.627 13.927,15.602 14.1,15.775 R13.2
NetD6_2: pad.C@12.75,15.375 U8.1 | length 1.3
  Top Layer w0.254: pad.C@12.725,15.7 12.725,16.525 12.975,16.775 U8.1
NetJ5_A5: J5.A5 R14.1 | length 2
  Top Layer w0.254: R14.1 9.4,26.825 10.156,26.069 v1(10.156,26.037)
  Bottom Layer w0.254: v1(10.156,26.037) 10.168,26.025 J5.A5
NetJ5_B5: J5.B5 R18.2 | length 3.2
  Top Layer w0.254: v1(13.525,22.3) R18.2
  Bottom Layer w0.254: J5.B5 12.278,24.252 12.637,24.252 13.525,23.364 v1(13.525,22.3)
NetJ6_1: J6.1 U2.19 | length 38.2
  Top Layer w0.254: v1(4.825,26.096) 4.725,26.196 4.725,30.983 3.894,31.814 3.894,34.244 5.85,36.2 U2.19
  Bottom Layer w0.254: v1(4.825,26.096) 5.598,25.323 5.598,11.53 5.596,11.528 5.596,9.145 5.764,8.977 12.523,8.977 J6.1
NetJ6_2: J6.2 U2.20 | length 40.4
  Top Layer w0.254: v1(5.625,26.125) 5.171,26.579 5.171,31.345 5.231,31.405 5.231,34.731 6.7,36.2 U2.20 ; v1(6.104,11.85) 6.081,11.85 5.944,11.713 5.944,9.94 7.085,8.799 8.094,8.799 9.235,7.658 9.235,4.715 9.685,4.265 13.265,4.265 J6.2
  Bottom Layer w0.254: v1(5.625,26.125) 5.625,25.783 5.95,25.458 5.95,11.981 6.081,11.85 v1(6.104,11.85)
NetJ6_3: J6.3 U2.15 | length 39.7
  Top Layer w0.254: v1(1.731,32.775) 1.731,32.769 2.903,31.597 v1(2.903,31.563) ; U2.15 v1(2.775,37.45)
  Bottom Layer w0.254: v1(1.731,32.775) 1.125,33.381 1.125,36.775 1.8,37.45 v1(2.775,37.45) ; v1(2.903,31.563) 2.937,31.563 3.55,30.95 3.55,23.7 5.254,21.996 5.254,11.673 5.252,11.671 5.252,9.002 5.622,8.633 10.867,8.633 J6.3
NetJ6_4: J6.4 U2.18 | length 37.1
  Top Layer w0.254: U2.18 5,36.2 3.3,34.5 3.3,31.922 4.319,30.903 4.319,23.655 9.69,18.284 11.025,18.284 11.174,18.135 11.174,15.64 10.244,14.71 10.244,11.847 11.235,10.856 11.235,6.265 J6.4
NetJ6_5: J6.5 pad.G R2.1 U2.12 | length 43.9
  Top Layer w0.254: U2.12 v1(2.775,40)
  Bottom Layer w0.254: pad.G 2.662,26.613 2.662,26.013 1.707,25.057 ; v1(2.775,40) 1.725,40 0.675,38.95 0.675,33.031 0.669,33.025 0.669,26.095 1.707,25.057 ; J6.5 9.211,8.289 5.479,8.289 4.908,8.86 4.908,11.813 4.91,11.815 4.91,21.854 1.707,25.057
NetJ6_6: J6.6 U2.33 | length 42.5
  Top Layer w0.254: v1(15.75,13.6) 15.75,15.466 18.406,18.122 18.406,37.56 16.848,39.117 16.283,39.117 U2.33
  Bottom Layer w0.254: J6.6 11.235,4.265 14.658,4.265 15.75,5.357 v1(15.75,13.6)
NetJ6_7: J6.7 U2.31 | length 41.6
  Top Layer w0.254: v1(13.65,19) 13.65,19.697 15.75,21.797 15.75,25.041 15.696,25.095 15.696,25.905 15.75,25.959 15.75,26.716 15.044,27.422 15.044,30.097 14.869,30.272 14.869,32.403 16.904,34.438 16.904,36.996 16.45,37.45 U2.31
  Bottom Layer w0.254: J6.7 9.235,6.265 15.012,6.265 15.235,6.488 15.235,16.224 14.352,17.107 14.352,17.629 14.306,17.675 14.306,18.353 13.659,19 v1(13.65,19)
NetJ6_8: J6.8 U2.32 | length 45.3
  Top Layer w0.254: U2.32 v1(16.775,38.3)
  Bottom Layer w0.254: J6.8 9.6,3.9 14.825,3.9 16.275,5.35 16.275,13.907 15.828,14.354 15.828,15.3 16.294,15.766 16.294,19.069 14.569,20.794 14.569,25.246 15.006,25.683 15.006,30.135 14.821,30.32 14.821,32.669 15.763,33.611 16.077,33.611 17.019,34.553 17.019,38.151 16.87,38.3 v1(16.775,38.3)
NetQ1_G: pad.D Q1.4 R1.1 | length 9.9
  Bottom Layer w0.254: R1.1 1.4,30.9 1.573,31.073 1.623,31.073 1.786,31.237 2.163,31.237 ; pad.D 2.163,31.237 ; Q1.4 4.348,27.825 3.894,28.279 3.894,31.287 3.112,32.069 2.693,32.069 2.163,31.538 2.163,31.237
NetQ3_D: Q3.D R3.1 | length 1
  Bottom Layer w0.254: Q3.D R3.1@0.75,48.3
NetR15_1: R15.1 U8.5 | length 1.8
  Top Layer w0.254: v1(12.4,18.95) 12.568,19.118 12.838,19.118 12.975,19.255 U8.5
  Bottom Layer w0.254: v1(12.4,18.95) 12.4,18.35 12.452,18.298 12.452,18.248 12.625,18.075 R15.1
OUT_A: C3.1 U1.3 U2.10 | length 30.9
  Top Layer w0.254: v1(1.731,41.7) U2.10 ; v1(3.15,17.025) 3.15,16.721 C3.1@3.29,16.581
  Bottom Layer w0.254: v1(1.731,41.7) 1.525,41.7 -0.05,40.125 -0.05,19.95 2.875,17.025 3.2,17.025 4.425,15.8 U1.3
OUT_B: C2.2 U1.6 U2.11 | length 30.4
  Top Layer w0.254: v1(0.475,20.175) 0.47,20.17 C2.2 0.634,17.561 0.634,17.238 2.159,15.713 2.159,13.591 v1(2.775,12.975) ; v1(1.731,40.85) U2.11
  Bottom Layer w0.254: v1(0.475,20.175) 0.325,20.325 0.325,39.444 v1(1.731,40.85) ; v1(2.775,12.975) 3.052,12.975 3.125,12.902 U1.6
SCK: D9.C J2.2 U2.27 U3.1 | length 58.6
  Top Layer w0.254: J2.2 7.286,3.096 14.471,3.096 15.579,4.204 15.579,11.159 ; v1@13.8,31.098 13.8,35.05 12.65,36.2 U2.27 12.65,37.225 13.433,38.008 v1(14.158,38.008) ; v1(14.65,12.325) 15.579,11.396 15.579,11.159 ; D9.C 16.125,11.705 15.579,11.159
  Power w0.254: v1(9.85,30.55) v1(11.725,30.55)
  Bottom Layer w0.254: v1(9.85,30.55) 9.85,30.236 9.206,29.592 9.206,25.122 8.619,24.535 8.619,20.899 14.675,14.843 14.675,12.35 v1(14.65,12.325) ; v1(11.725,30.55) 12.5,30.55 13.025,31.075 v1(13.8,31.075) ; v1(14.158,38.008) 14.5,38.35 U3.1
SCL: J4.1 R6.1 U2.5 U5.3 U5.4 | length 45.7
  Top Layer w0.254: v1(3.025,45.975) 3,45.95 U2.5 2.05,45.95 0.193,44.093 0.193,32.082 2.937,29.338 2.937,19.488 6.444,15.981 6.444,15.065 6.74,14.769 6.951,14.769 7.112,14.608 7.112,12.477 7.75,11.839 7.75,10.975 R6.1@7.7,10.925
  Bottom Layer w0.254: v1(3.025,45.975) 3.025,46.09 3.985,47.05 U5.4 U5.3 ; v1(7.75,11.3) J4.1
SDA: J4.2 R7.1 U2.6 U5.1 U5.6 | length 48.1
  Top Layer w0.254: v1(5.5,48.95) 5.5,47.275 3.325,45.1 U2.6 2.05,45.1 0.537,43.587 0.537,32.224 3.281,29.481 3.281,19.66 7.456,15.485 7.456,12.619 v1(8.75,11.325) 8.75,11.05 R7.1@8.85,10.95
  Bottom Layer w0.254: U5.6 v1(5.5,48.95) U5.1 ; v1(8.75,11.325) J4.2
VBAT: C16.2 J6.11 J6.12 pad.3 Q1.1 Q1.2 Q1.3 R1.2 R9.1 R13.1 TP4.1 U8.3 VBAT.1 | length 7.7
  Top Layer w0.254: TP4.1@1.15,5.175 1.429,5.175 2.074,5.82 C16.2 3.476,5.82 4.046,5.25 J6.12 ; v1(8.7,27.98) 8.7,28.252 8.873,28.425 R9.1 ; U8.3 14.9,16.875 v1(15.3,16.875) 15.3,16.025 15.273,15.998 15.273,15.948 15.1,15.775 R13.1 ; pad.3 v1(17.15,30.675)
  Power w0.254: TP4.1@0.374,4.985 0.921,4.985 TP4.1 TP4.1@1.054,5.118 ; J6.12@4.213,5.213 J6.12
  Bottom Layer w0.254: v1(1.4,29.475) R1.2 ; Q1.3@5.475,27.725 Q1.3
  other v1: 6.4,26.35 6.975,26.35 7.475,26.6
VCPU: C1.2 C4.2 C7.2 C8.2 C9.2 J2.5 J4.3 pad.A@0.675,48.55 R4.1 R5.1 R6.2 R7.2 R12.2 U2.3 U3.9 U3.10 U4.1 U5.5 U6.5 U7.3 | length 61.8
  Top Layer w0.254: pad.A@0.675,48.7 0.687,48.688 0.687,48.013 1.05,47.65 U2.3 2.323,47.723 2.523,47.723 2.775,47.975 v1(3.075,47.975) ; R6.2 R7.2 8.875,10 9.048,10.173 9.327,10.173 9.476,10.322 9.476,10.365 9.625,10.514 9.704,10.514 C8.2@10.03,10.84 ; R4.1 8.3,14.925 8.854,14.371 v1(8.896,14.371) ; v1@8.896,14.379 9.125,14.608 9.133,14.608 9.45,14.925 R5.1 9.45,11.625 9.75,11.325 v1(9.95,11.325) 9.95,10.92 C8.2@10.03,10.84 ; C8.2 C8.2@10.03,10.84 ; C1.2 17.725,2.005 v1(17.725,2.4)
  Power w0.254: v1(9.95,11.325) 17.225,11.325 18.45,12.55 ; 15.4,37.9 15.475,37.825 ; 16.825,35.85 18.45,34.225 18.45,12.55 ; 18.45,6.64 18.45,12.55
  Bottom Layer w0.254: v1(3.075,47.975) 4.27,47.975 U5.5 ; C7.2 v1(5.45,42.175) ; v1(5.35,45.65) 5.35,45.363 5.523,45.19 U4.1 ; J4.3 9.75,11.525 v1(9.95,11.325) ; U3.9 U3.9@14,43.925 ; U7.3 14.5,47.986 14.649,48.135 R12.2 ; U6.5 15.5,34.325 v1(16,34.325) 16.059,34.384 16.059,34.594 15.758,34.895 15.758,35.352 C9.2 C9.2@15.53,35.47
  other v1: 14.25,44.225 14.5,47.85
VOUT: D1.C J1.1 J1.2 Q1.5_8 | length 0.6
  Top Layer w0.254: D1.C v1(4.575,33.825)
  Bottom Layer w0.254: 3.825,34.05 3.863,34.012 ; J1.2@6.212,34.012 J1.2
  Bottom Layer w0.5: 3.863,34.012 3.863,34.088 3.875,34.1 ; J1.2@6.179,33.979 J1.2@6.212,34.012
VUSB: J5.A4 J5.A9 J5.B4 J5.B9 U9.5 X1.1 | length 11.6
  Top Layer w0.254: U9.5@8.079,24.3 8.104,24.325 v1(9.125,24.325) ; v1(12.75,26.275) 13.7,26.275 13.827,26.402 13.877,26.402 14.05,26.575 X1.1
  Power w0.254: v1(9.125,24.325) 9.694,24.894 10.606,24.894 10.625,24.913 11.538,24.913 ; v1(11.721,23.757) 11.721,24.729 11.538,24.913 ; v1(12.75,26.275) 12.144,25.669 12.144,25.519 11.538,24.913
  Bottom Layer w0.254: J5.A9 10.978,23.548 11.513,23.548 v1(11.721,23.757) ; J5.A4 11.646,26.525 11.873,26.298 12.232,26.298 J5.B9 v1(12.75,26.275) ; v1@11.727,23.752 12.232,23.752 J5.B4
VUSB_FUSED: C12.2 C15.1 D5.A pad.1 R10.1 U8.4 X1.2 | length 17.4
  Top Layer w0.254: v1(13.925,25.25) C12.2 C12.2@13.935,24.765 ; v1(14.325,28.625) 14.055,28.625 D5.A X1.2 14.05,27.475 14.223,27.302 14.382,27.302 15.075,26.609 R10.1 R10.1@15.065,24.765 ; v1(14.475,19.35) 14.825,19.35 U8.4 ; v1(15.589,30.421) 15.616,30.448 15.923,30.448 pad.1
  Top Layer w0.5: C12.2@13.935,24.765 R10.1@15.065,24.765
  Power w0.254: v1(13.925,25.25) 14.031,25.144 14.031,19.669 14.35,19.35 v1(14.475,19.35) ; v1(14.325,28.625) 14.325,29.012 15.589,30.276 v1(15.589,30.421)
  Bottom Layer w0.254: v1(14.475,19.35) 14.589,19.35 15.414,18.525 15.414,18.446 15.74,18.12 C15.1
pads on no net: J5.A2 J5.A3 J5.A8 J5.A10 J5.A11 J5.B2 J5.B3 J5.B8 J5.B10 J5.B11 U2.17 U2.21 U2.22 U2.30 U2.34 U2.35 U2.36 U2.39 U2.40 U2.41 U2.44 U6.4

## Polygon pours and split planes (outlines as drawn)
GND on GND "GND_L02_P001" (solid, pour order 1): -0.25,51 18.75,51 18.75,-0.25 -0.25,-0.25
GND on Top Layer "GND_L01_P028" (solid, pour order 28): -0.25,51.05 18.75,51.05 18.75,-0.25 -0.25,-0.25
GND on Top Layer "GND_L01_P022" (solid, pour order 22): 9.379,29.15 9.379,30.1 7.529,30.1 7.529,29.15
NetC13_1 on Top Layer "NETC13_1_L01_P021" (solid, pour order 21): 8.4,28.85 8.4,28 7.225,26.825 6.275,26.825 6.275,28.85
GND on Top Layer "GND_L01_P020" (solid, pour order 20): 5.275,28.85 6.175,28.85 6.175,26.825 5.275,26.825
VCPU on Power "VCPU_L03_P014" (solid, pour order 14): 14.825,33.85 14.8,35.7 -0.25,35.7 -0.25,51.05 18.75,51.1 18.75,33.85
VCPU on Power "VCPU_L03_P023" (solid, pour order 23): 18.75,6.725 18.75,-0.25 12,-0.25 -0.25,-0.25 -0.25,2.825 14.025,2.825 17.925,6.725
VBAT on Power "VBAT_L03_P015" (solid, pour order 15): -0.25,35.425 14.6,35.425 14.6,33.675 17.925,33.675 17.925,6.725 14.025,2.825 -0.25,2.825 -0.275,2.85
GND on Bottom Layer "GND_L04_P033" (solid, pour order 33): -0.25,51.05 18.75,51.05 18.75,-0.25 -0.25,-0.25
VBAT on Bottom Layer "VBAT_L04_P032" (solid, pour order 32): 5.175,28.325 5.18,28.33 7.121,28.33 7.121,27.312 7.725,26.708 7.725,26.125 6.275,26.125 6.1,26.3 6.1,27.05 5.125,27.05
GND on Bottom Layer "GND_L04_P026" (solid, pour order 26): 2.063,27.913 0.988,27.913 0.988,26.313 2.063,26.313
GND on Bottom Layer "GND_L04_P025" (solid, pour order 25): 13.65,44.075 13.55,45.275 12.85,45.275 12.85,43.575 12.45,43.175 12.45,42.375 13.15,42.375 13.65,43.025
VCPU on Bottom Layer "VCPU_L04_P024" (solid, pour order 24): 13.8,45.275 13.8,43.375 14.65,43.375 14.65,45.05 14.425,45.275
VOUT on Bottom Layer "VOUT_L04_P019" (solid, pour order 19): 3.525,34.9 7.15,34.9 7.2,28.475 4.4,28.475 3.525,33.75

## Keep-outs
Keep-Out Layer:
  pour cut-out: 15.625,30.225 16.925,30.225 16.925,31.125 15.625,31.125

## Silkscreen, mask and mechanical layers (free items; w line width, h text height)
Top Overlay:
  circle w0.2: c9.265,31.268 r0.1
  circle w0.2: c7.375,31.15 r0.1
  circle w0.254: c15.425,31.175 r0.035
  lines w0.127: 0.2,49.16 0.2,49.23 0.2,49.37 0.2,49.44 ; 0.425,50.75 0.933,50.75 ; 1.15,49.17 1.15,49.45 ; 7.285,29.675 7.285,30.475 ; 8.215,29.675 8.215,30.475 ; 8.485,29.675 8.485,30.475 ; 9.415,29.675 9.415,30.475 ; 12.275,14.485 12.275,14.765 ; 12.496,16.072 13.004,16.072 ; 13.2,14.485 13.2,14.765
  text "BAT+" at 0.327,3.302 h0.5
Bottom Overlay:
  circle w0.2: c3.4,27.525 r0.1
  lines w0.127: 1.362,28.24 1.362,28.713 1.543,28.713 ; 2.782,28.713 2.963,28.713 2.963,28.24
Top Paste:
  region: 15.775,30.325 15.775,30.575 16.075,30.575 16.075,30.325
  region: 15.775,30.775 15.775,31.025 16.075,31.025 16.075,30.775
  region: 16.475,30.375 16.475,30.975 16.775,30.975 16.775,30.375
Top Solder:
  circle w1: c0.8,1.55 r0.5
  circle w0.5: c0.8,1.55 r0.25
  circle w1: c1.525,21.225 r0.5
  circle w0.5: c1.525,21.225 r0.25
  region: 15.675,30.275 15.675,30.625 16.175,30.625 16.175,30.275
  region: 15.675,30.725 15.675,31.075 16.175,31.075 16.175,30.725
  region: 16.375,30.275 16.375,31.075 16.875,31.075 16.875,30.275
  lines w1: 0.3,1.55 1.3,1.55 ; 1.025,21.225 2.025,21.225
Bottom Solder:
  circle w0.5: c0.8,1.55 r0.25
  circle w1: c0.8,1.55 r0.5
  circle w1: c2.575,20.65 r0.5
  circle w0.5: c2.575,20.65 r0.25
  circle w1: c10.65,47.8 r0.5
  circle w0.5: c10.65,47.8 r0.25
  lines w1: 0.3,1.55 1.3,1.55 ; 2.075,20.65 3.075,20.65 ; 10.15,47.8 11.15,47.8
Mechanical 1:
  lines w0.254: 1.55,51.1 16.95,51.1 16.95,56.175 1.55,56.2 1.55,51.1
Mechanical 13:
  circle w0.2: c9.077,31.521 r0.1
  circle w0.2: c7.877,31.521 r0.1
  circle w0.2: c2.662,26.813 r0.1
  lines w0.127: 0.275,48.5 0.275,50.1 1.075,50.1 1.075,48.5 0.275,48.5 ; 1.362,27.913 1.362,28.713 2.963,28.713 2.963,27.913 1.362,27.913 ; 7.42,29.645 8.08,29.645 8.08,30.505 7.42,30.505 7.42,29.645 ; 8.62,29.645 9.28,29.645 9.28,30.505 8.62,30.505 8.62,29.645 ; 12.35,13.825 12.35,15.425 13.15,15.425 13.15,13.825 12.35,13.825
Mechanical 15:
  lines w0.05: 0.005,47.93 0.005,50.67 1.345,50.67 1.345,47.93 0.005,47.93 ; 1.112,27.063 1.112,29.563 3.213,29.563 3.213,27.063 1.112,27.063 ; 7.22,29.075 8.28,29.075 8.28,31.075 7.22,31.075 7.22,29.075 ; 8.42,29.075 9.48,29.075 9.48,31.075 8.42,31.075 8.42,29.075 ; 12.08,13.255 12.08,15.995 13.42,15.995 13.42,13.255 12.08,13.255

## Text inside footprints (layer, text, board x,y; h text height)
U2: Top Overlay "ANTENNA" at 4.204,52.754 h1.52